# Altium PCB PDB.PcbDoc
Units mm, origin at the board's own origin, x right, y up, seen from the top; angles counter-clockwise.
Board outline 100 x 100 mm, 2 copper layers (Top Layer, Bottom Layer); 15 components, 13 nets, 42 pads, 0 vias.
Unrouted connection lines stored in the file: 27.
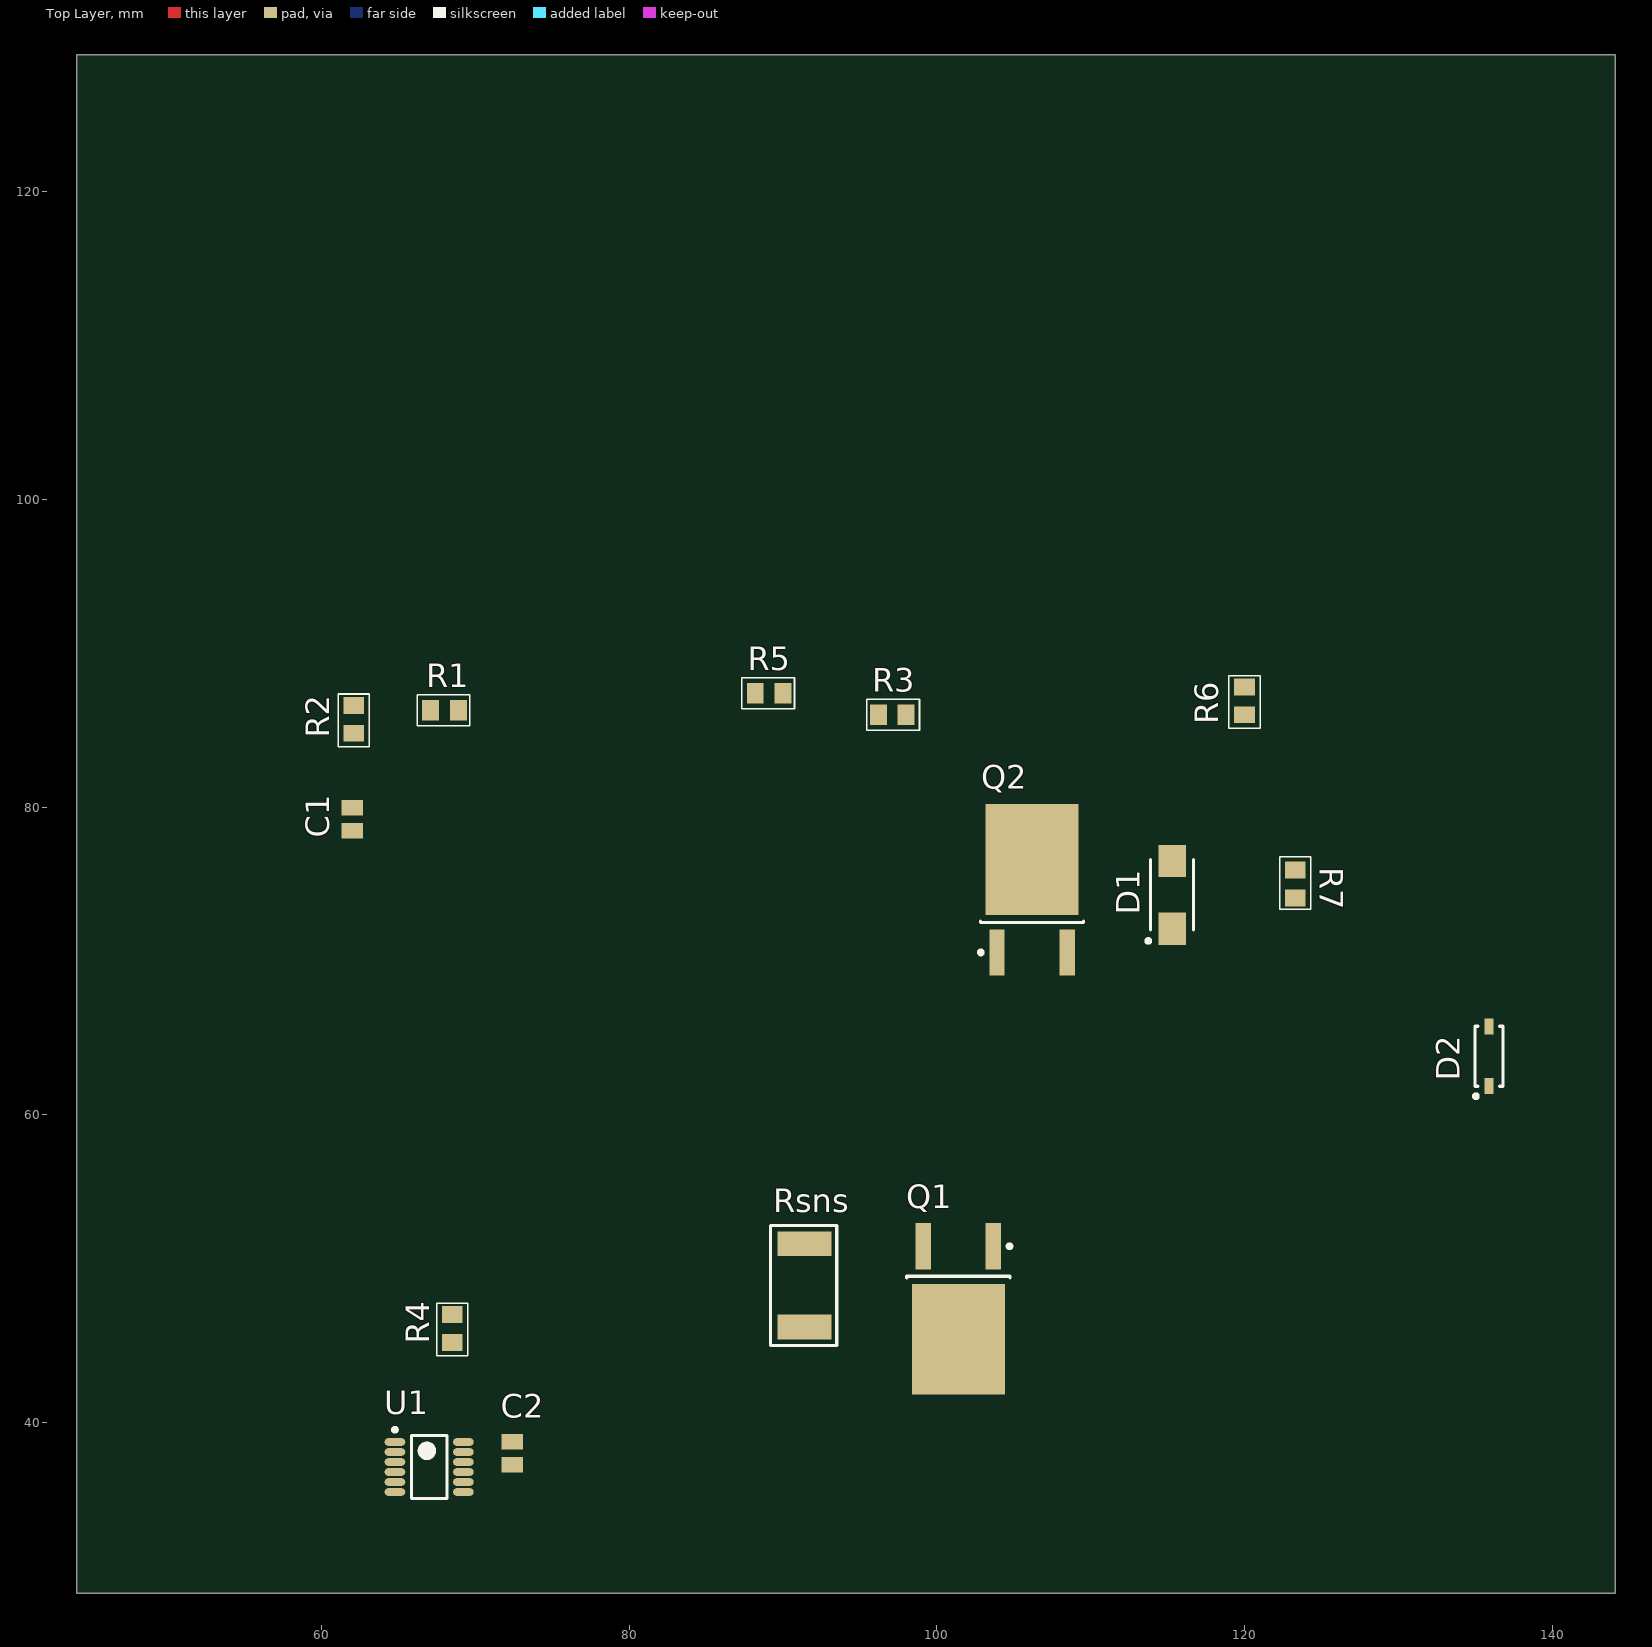
[diagram p0: Top Layer view]
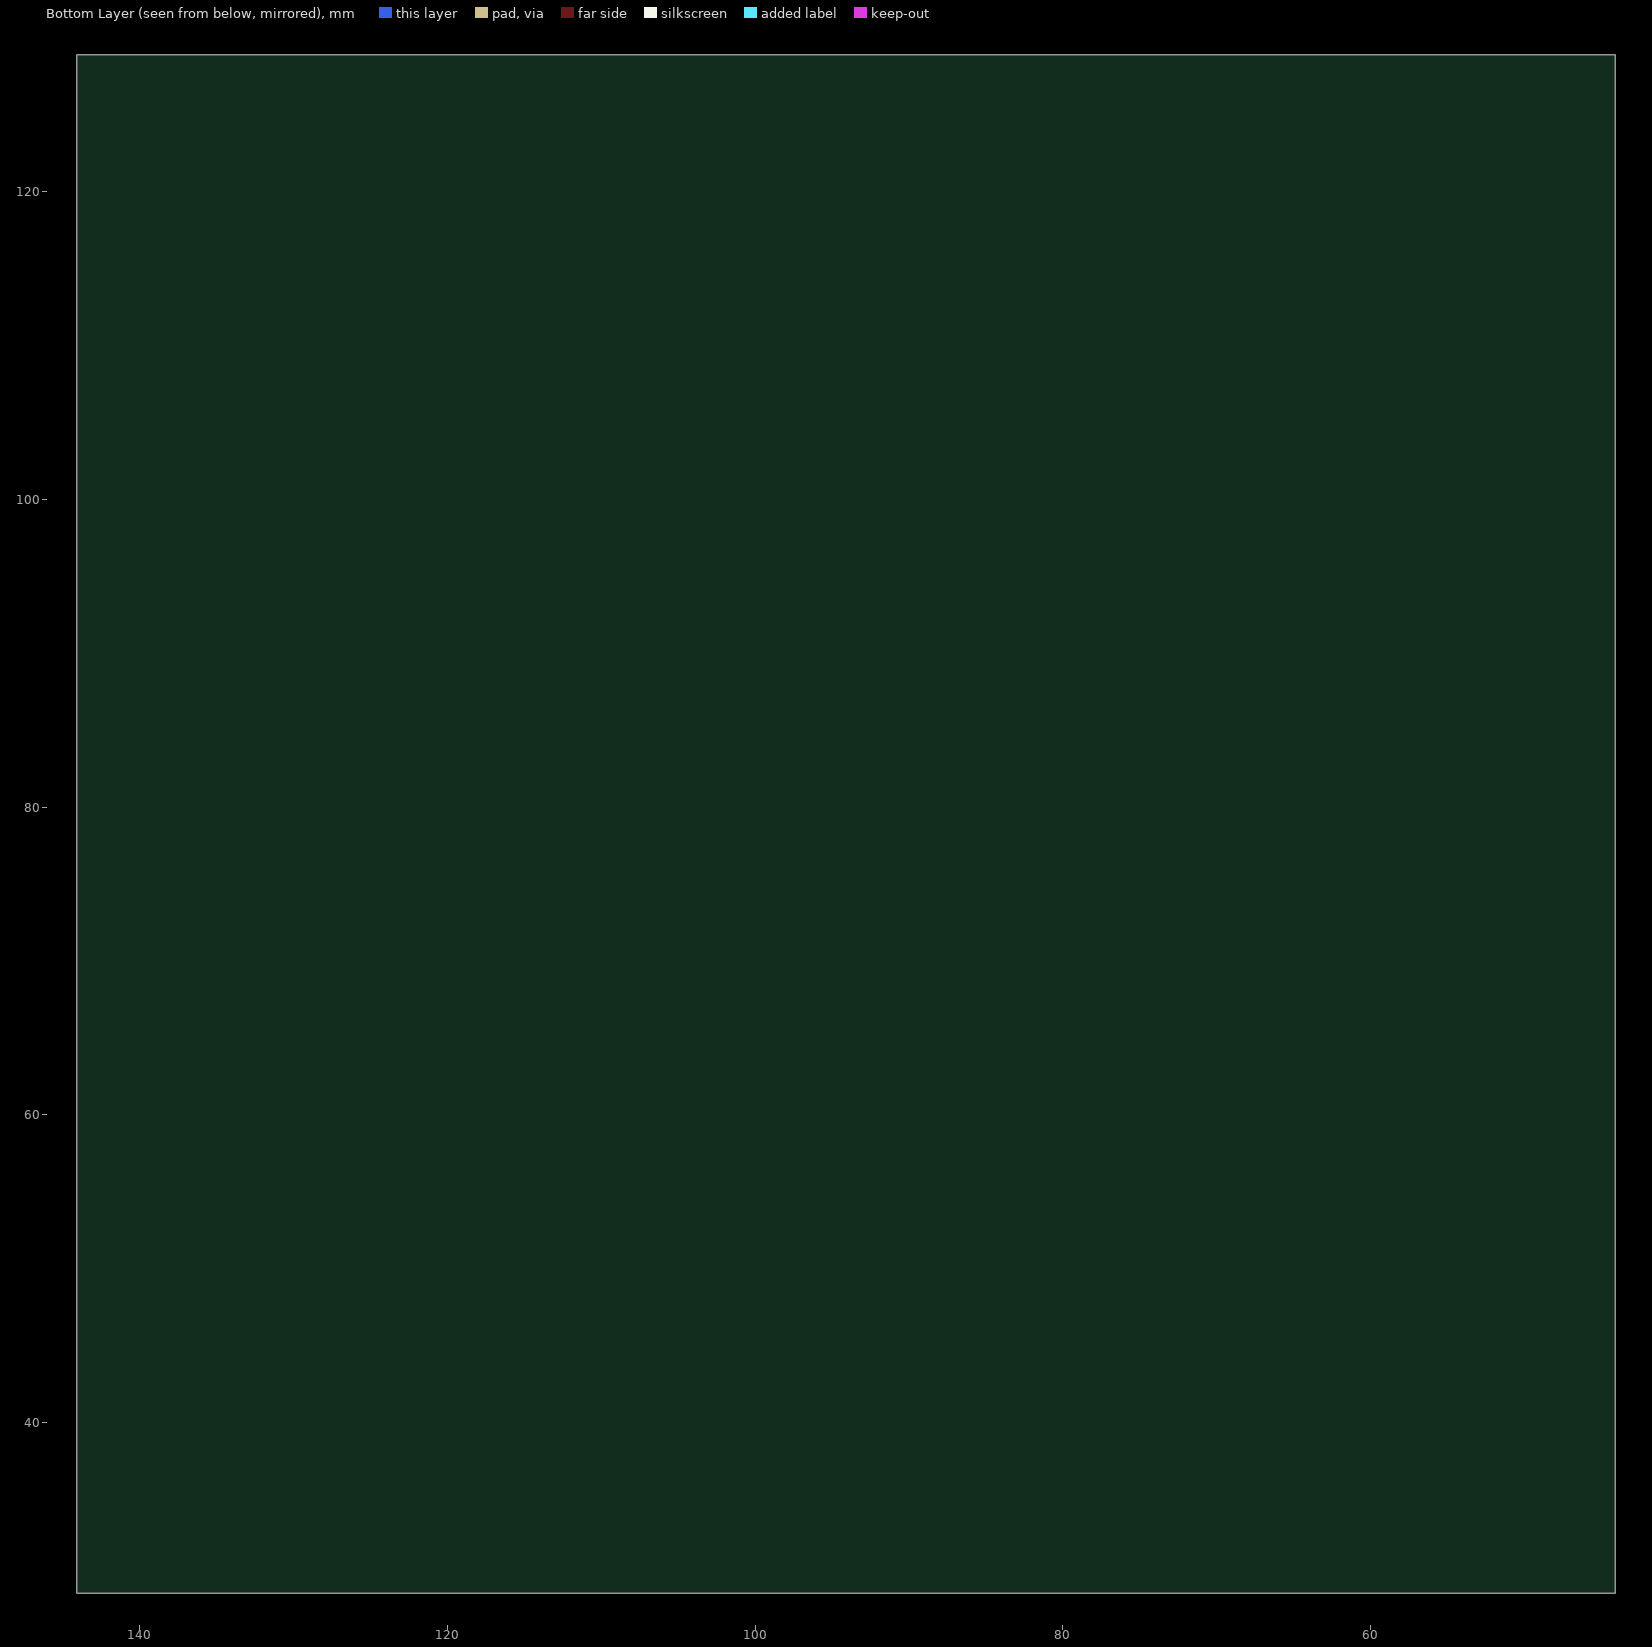
[diagram p1: Bottom Layer view, seen from below]

## Layer stack, top to bottom
Top Solder: solder mask 0.0102, Solder Resist, Dk 3.5
Top Layer: signal copper 0.0356
Dielectric 1: dielectric 0.32, FR-4, Dk 4.8
Bottom Layer: signal copper 0.0356
Bottom Solder: solder mask 0.0102, Solder Resist, Dk 3.5

## Board outline
44.1,28.9 44.1,128.9 144.1,128.9 144.1,28.9

## Design rules (kind name [scope] priority, off if disabled: settings)
Clearance [All] p1: gap=0.254 ignorepadtopadclearanceinfootprint=TRUE except(0: Arc-Hole Track-Hole SMDPad-Hole THPad-Hole Via-Hole Fill-Hole Poly-Hole Region-Hole Text-Hole)
PolygonConnect [All] p1: connectstyle=Relief reliefconductorwidth=0.254 reliefentries=4 polygonreliefangle="90 Angle" airgapwidth=0.254
RoutingVias [All] p1: holewidth=0.711 width=1.27 viastyle="Through Hole" minholewidth=0.711 minwidth=1.27 maxholewidth=0.711 maxwidth=1.27
SolderMaskExpansion [All] p1: expansion=0.102
Width [All] p1: maxlimit=0.254 minlimit=0.254 preferedwidth=0.254
30 further rules are at their usual default settings.

## Components (designator, comment, footprint, x,y, rotation, side; value= is the part's Value field where it differs from the comment)
C1 "47nF" CAPC1613X09N 62,79.2 r90 top
C2 "0.1uF C" CAPC1613X09N 72.4,38 r90 top
D1 "TVS DIODE" DIODE_TVS 115.3,74.3 r90 top
D2 "Zerner Diod" DIOM3716X14N 135.9,63.8 r90 top
Q1 "IRLR2908TRLPBF" DPAK 101.4,47.35 r270 top
Q2 "STD35P6LLF6" DPAK 106.2,74.65 r90 top
R1 "100K Resistor" R0805 68,86.3 r0 top
R2 "5K" R0805 62.1,85.7 r90 top
R3 "10 ohm" R0805 97.1,86 r180 top
R4 "220K R" R0805 68.5,46.1 r90 top
R5 "10K" R0805 89.1,87.4 r0 top
R6 "5K" R0805 120,86.9 r90 top
R7 "10K" R0805 123.3,75 r270 top
Rsns "0.01OHM" R2512 91.4,48.9 r90 top
U1 "LT4363" TSOP65P490X110-12N 67,37.1 r0 top

## Footprints (in the part's own frame and the unit in brackets; to place one, negate y for a bottom-side part, rotate by r counter-clockwise, add the part's x,y. Pads: shape width x height; smd on the part's side, far side on the other; paste and mask are expansions set on the pad)
CAPC1613X09N [mm] "Chip Capacitor, 2-Leads, Body 1.60x1.30mm, IPC Medium Density"
  rect 1x1.4 smd: 1(-0.75,0) 2(0.75,0)
  body extent -0.85,-0.67 0.85,0.67, height 0.9
DIODE_TVS [mm] "Molded Diode, 2-Leads, Body 4.29x2.59mm, IPC Medium Density"
  rect 2.1x1.8 smd: 1(-2.2,0) 2(2.2,0)
  silkscreen extent -3.12,-1.4 2.3,1.67, body extent -2.52,-1.4 2.52,1.4, height 2.29
DIOM3716X14N [mm] "Molded Diode, 2-Leads, Body 3.70x1.60mm, IPC Medium Density"
  rect 1.05x0.6 smd: 1(-1.925,0) 2(1.925,0)
  silkscreen extent -2.72,-0.9 1.95,0.97, body extent -2.14,-0.9 2.14,0.9, height 1.35
DPAK [mm] "D-PAK, 3-Pads, Body 6.21x6.73mm (max), IPC Medium Density"
  rect 3x1 smd: 1(-4.1,2.28) 3(-4.1,-2.28)
  rect 7.2x6.05 smd: 4(1.95,0)
  silkscreen extent -4.22,-3.35 -2.05,3.46, body extent -4.39,-3.37 5.52,3.37, height 2.52
R0805 [mm] "Chip Resistor, 2-Leads, Body 2.09x1.30mm, IPC Medium Density"
  rect 1.1x1.35 smd: 1(-0.9,0) 2(0.9,0)
  silkscreen extent -1.78,-1.02 1.65,1.02, body extent -1.1,-0.67 1.1,0.67, height 0.6
R2512 [mm]
  rect 1.6x3.5 smd: 1(-2.7,0) 2(2.7,0)
  silkscreen extent -3.9,-2.1 3.9,2.2
TSOP65P490X110-12N [mm] "TSOP, 12-Leads, Body 4.04x3.00mm, Pitch 0.65mm, IPC Medium Density"
  oval 1.35x0.5 smd: 1(-2.225,1.625) 2(-2.225,0.975) 3(-2.225,0.325) 4(-2.225,-0.325) 5(-2.225,-0.975) 6(-2.225,-1.625) 7(2.225,-1.625) 8(2.225,-0.975) 9(2.225,-0.325) 10(2.225,0.325) 11(2.225,0.975) 12(2.225,1.625)
  silkscreen extent -2.35,-2.05 1.15,2.55, body extent -2.45,-2.05 2.45,2.05, height 1.1

## Part data
C1: library part GCM188R71H473KA55D, "CAP CER 0.047UF 50V X7R 0603", Case/Package=0603, Case Code (Metric)=1608, Dielectric=X7R, Manufacturer=Murata, Max Operating Temperature=125°C, Min Operating Temperature=-55°C, Package Quantity=1, Ratings=AEC-Q200, Supplier Part Number 1=490-4934-1-ND, Tolerance=10%, Voltage=50V, Capacitance=47nF, Case Code (Imperial)=0603, Depth=0.8mm, Height=0.8mm, Lead Free="Lead Free", Length=1.6mm, Manufacturer Part Number=GCM188R71H473KA55D, Mount="Surface Mount", Packaging="Tape and Reel", Pricing 1="1=0.16, 10=0.115, 100=0.054, 500=0.03788, 1000=0.03136 (USD)", Radiation Hardening=No, REACH SVHC="No SVHC", Stock 1=40000, Supplier 1=Digi-Key, Termination=SMD/SMT, Thickness=0.035inch, Voltage Rating=50V, Voltage Rating (DC)=50V, Width=0.031inch
C2: library part CL05A104KA5NNNC, "Cap Ceramic 0.1uF 25V X5R 10% SMD 0402 85C Paper T/R", Capacitance=100nF, Case/Package=0402, Case Code (Metric)=1005, Dielectric=X5R, Manufacturer=Samsung, Max Operating Temperature=85°C, Min Operating Temperature=-55°C, Package Quantity=1, Supplier Part Number 1=1276-1043-6-ND, Tolerance=10%, Voltage=25V, Case Code (Imperial)=0402, Depth=0.5mm, Height=0.5mm, Lead Free="Lead Free", Length=1mm, Manufacturer Part Number=CL05A104KA5NNNC, Mount="Surface Mount", Packaging="Tape and Reel", Pricing 1="1=0.1, 10=0.032, 100=0.0141, 500=0.01006, 1000=0.00791, 2500=0.00719, 5000=0.00661 (USD)", Radiation Hardening=No, Stock 1=100000, Supplier 1=Digi-Key, Thickness=0.022inch, Voltage Rating=25V, Voltage Rating (DC)=25V, Width=0.02inch
D1: library part SMAJ58A-13-F, "TVS DIODE 58VWM 93.6VC SMA", Breakdown Voltage=64.4V, Capacitance=180pF, Case/Package=SMA, Clamping Voltage=93.6V, Current=43A, Forward Voltage=3.5V, Leakage Current=5uA, Manufacturer=Diodes, Max Breakdown Voltage=71.2V, Max Operating Temperature=150°C, Max Output Current=4.3A, Max Power Dissipation=400W, Max Surge Current=40A, Min Operating Temperature=-55°C, Package Quantity=5000, Power Line Protection=No, Reverse Standoff Voltage=58V, Supplier Part Number 1=SMAJ58A-13-FDIDKR-ND, Test Current=1mA, Composition=Zener, Contact Plating=Matte,Tin, Direction=Unidirectional, Element Configuration=Single, ESD Protection=No, Height=2.3mm, Lead Free="Lead Free", Length=2.92mm, Manufacturer Part Number=SMAJ58A-13-F, Max Reverse Leakage Current=5uA, Min Breakdown Voltage=64.4V, Mount="Surface Mount", Number of Elements=1, Number of Pins=2, Number of Unidirectional Channels=1, Packaging="Tape and Reel", Peak Pulse Current=4.3A, Peak Pulse Power=400W, Polarity=Unidirectional, Power Dissipation=400W, Pricing 1="1=0.41, 10=0.311, 100=0.1937, 500=0.13256, 1000=0.10197 (USD)", Radiation Hardening=No, Reverse Breakdown Voltage=64.4V, Stock 1=387453, Supplier 1=Digi-Key, Termination=SMD/SMT, Voltage=58V, Width=4.6mm, Working Voltage=58V
D2: library part 1N4148W-TP, "DIODE GEN PURP 100V 150MA SOD123", Average Rectified Current=150mA, Capacitance=4pF, Forward Voltage=1V, Manufacturer=MCC, Max Forward Surge Current (Ifsm)=1A, Max Operating Temperature=150°C, Max Repetitive Reverse Voltage (Vrrm)=100V, Max Reverse Leakage Current=5uA, Max Surge Current=2A, Min Operating Temperature=-65°C, Package Quantity=3000, Power Dissipation=400mW, Supplier Part Number 1=1N4148WTPMSDKR-ND, Current Rating=150mA, Element Configuration=Single, Forward Current=150mA, Height=1.2mm, Lead Free="Lead Free", Length=2.85mm, Manufacturer Part Number=1N4148W-TP, Max Reverse Voltage (DC)=100V, Mount="Surface Mount", Number of Pins=2, Output Current=150mA, Packaging="Tape and Reel", Peak Non-Repetitive Surge Current=2A, Polarity=Standard, Pricing 1="1=0.14, 10=0.131, 100=0.0856, 500=0.04186, 1000=0.02854 (USD)", Radiation Hardening=No, REACH SVHC=Unknown, Recovery Time=4ns, Reverse Recovery Time=4ns, Stock 1=546277, Supplier 1=Digi-Key, Voltage Rating (DC)=100V, Width=1.8mm
Q1: "MOSFET N-CH 80V 30A DPAK", Case/Package=DPAK, Continuous Drain Current (ID)=39A, Drain to Source Breakdown Voltage=80V, Drain to Source Resistance=28mR, Gate to Source Voltage (Vgs)=16V, Input Capacitance=1.89nF, Manufacturer="International Rectifier", Max Operating Temperature=175°C, Max Power Dissipation=120W, Min Operating Temperature=-55°C, On-State Resistance=28MR, Package Quantity=1, Supplier Part Number 1=IRLR2908TRLPBFDKR-ND, Threshold Voltage=1V, Drain to Source Voltage (Vdss)=80V, Element Configuration=Single, Fall Time=55ns, Height=2.26mm, Length=6.73mm, Manufacturer Part Number=IRLR2908TRLPBF, Mount="Surface Mount", Nominal Vgs=1V, Number of Elements=1, Number of Pins=3, Packaging="Tape and Reel", Power Dissipation=120W, Pricing 1="1=1.4, 10=1.239, 100=0.9794, 500=0.75958, 1000=0.59966 (USD)", Radiation Hardening=No, Rds On Max=28mR, REACH SVHC="No SVHC", Rise Time=95ns, Stock 1=4490, Supplier 1=Digi-Key, Turn-Off Delay Time=36ns, Turn-On Delay Time=12ns, Width=6.22mm
Q2: "POWER MOSFET", Case/Package=TO-252-3, Continuous Drain Current (ID)=35A, Drain to Source Voltage (Vdss)=60V, Input Capacitance=3.78nF, Manufacturer=STMicroelectronics, Max Power Dissipation=70W, Supplier Part Number 1=497-15462-6-ND, Manufacturer Part Number=STD35P6LLF6, Mount="Surface Mount", Packaging="Tape and Reel", Pricing 1="1=1.41, 10=1.248, 100=0.9867, 500=0.76518, 1000=0.6041 (USD)", Rds On Max=28mR, Stock 1=7152, Supplier 1=Digi-Key
R1: library part ERA-6AEB104V, "Res Thin Film 0805 100K Ohm 0.1% 0.125W(1/8W) ±25ppm/C Molded SMD Automotive Punched T/R", Case/Package=0805, Case Code (Metric)=2012, Manufacturer=Panasonic, Max Operating Temperature=155°C, Max Power Dissipation=125mW, Min Operating Temperature=-55°C, Package Quantity=1, Resistance=100kR, Temperature Coefficient=25ppm/°C, Tolerance=0.1%, Voltage Rating=100V, Case Code (Imperial)=0805, Composition="Thin Film", Contact Plating=Tin, Depth=1.25mm, Features="Automotive AEC-Q200", Height=0.5mm, Lead Free="Lead Free", Length=2mm, Manufacturer Part Number=ERA-6AEB104V, Military Standard=Not, Mount="Surface Mount", Number of Pins=2, Number of Terminations=2, Packaging="Tape and Reel", Power Rating=125mW, Pricing 1="1=0.324, 10=0.2241, 25=0.2017, 100=0.1064, 250=0.0956, 500=0.0945, 1000=0.0477, 3000=0.0408 (USD)", Radiation Hardening=No, REACH SVHC="No SVHC", Stock 1=2428, Supplier 1=Arrow, Supplier Part Number 1=ERA-6AEB104V, Termination=Solder, Voltage Rating (DC)=100V, Width=1.25mm
R2 R6: library part PNM0805E5001BST5, "Thin Film Resistors - SMD 200mW 5Kohm 0.1% 25ppm", Case/Package=0805, Case Code (Metric)=2012, Manufacturer="Vishay Dale Thin Film", Max Operating Temperature=125°C, Min Operating Temperature=-55°C, Power Rating=200mW, Resistance=5kR, Supplier Part Number 1=1857222, Temperature Coefficient=25ppm/°C, Tolerance=0.1%, Voltage Rating=100V, Case Code (Imperial)=0805, Composition="Thin Film", Height=0.015inch, Length=0.08inch, Manufacturer Part Number=PNM0805E5001BST5, Packaging="Tape and Reel", Pricing 1="1=2.59, 10=1.9, 50=1.53, 100=1.36 (GBP)", Radiation Hardening=No, REACH SVHC=Unknown, Stock 1=1231, Supplier 1=Farnell, Voltage Rating (DC)=100V, Width=0.05inch
R3: library part RL1220S-100-F, "RES SMD 10 OHM 1% 1/3W 0805", Case/Package=0805, Case Code (Metric)=2012, Manufacturer=Susumu, Max Operating Temperature=125°C, Max Power Dissipation=333mW, Min Operating Temperature=-55°C, Package Quantity=1, Power Rating=250mW, Resistance=10R, Supplier Part Number 1=754-RL1220S-100-F, Temperature Coefficient=200ppm/°C, Tolerance=1%, Voltage Rating (DC)=100V, Case Code (Imperial)=0805, Composition="Thin Film", Height=0.02inch, Lead Free="Lead Free", Length=0.079inch, Manufacturer Part Number=RL1220S-100-F, Number of Pins=2, Number of Terminations=2, Packaging="Tape and Reel", Pricing 1="1=0.34, 10=0.156, 50=0.156, 100=0.07, 1000=0.048, 10000=0.034 (USD)", REACH SVHC=Unknown, Stock 1=32764, Supplier 1=Mouser, Termination=SMD/SMT, Weight=0.000194oz, Width=0.049inch
R4: library part KTR10EZPF2203, "RES 220K OHM 1/8W 1% 0805 SMD", Case/Package=0805, Manufacturer=Rohm, Resistance=220000R, Supplier Part Number 1=RHM220KAHDKR-ND, Manufacturer Part Number=KTR10EZPF2203, Pricing 1="1=0.19, 10=0.16, 100=0.0624, 1000=0.02614, 2500=0.02396 (USD)", Stock 1=23335, Supplier 1=Digi-Key
R5 R7: library part RNCF0805DTE10K0, "Res Thin Film 0805 10K Ohm 0.5% 0.1W(1/10W) ±25ppm/C Molded SMD Paper T/R", Case/Package=0805, Case Code (Metric)=2012, Manufacturer="Stackpole Electronics", Max Operating Temperature=155°C, Max Power Dissipation=125mW, Min Operating Temperature=-55°C, Resistance=10kR, Supplier Part Number 1=RNCF0805DTE10K0DKR-ND, Temperature Coefficient=25ppm/°C, Tolerance=0.5%, Case Code (Imperial)=0805, Composition="Thin Film", Contact Plating=Matte,Tin, Depth=1.25mm, Features="Moisture Resistant", Height=0.026inch, Length=2mm, Manufacturer Part Number=RNCF0805DTE10K0, Military Standard=Not, Mount="Surface Mount", Number of Terminations=2, Packaging="Tape and Reel", Pricing 1="1=0.17, 10=0.14, 100=0.0546, 1000=0.02287, 2500=0.02096 (USD)", Radiation Hardening=No, Stock 1=377154, Supplier 1=Digi-Key, Width=0.049inch
Rsns: library part PE2512FKE7W0R01L, "RES SMD 0.01 OHM 1% 2W 2512", Case/Package=2512, Case Code (Metric)=6432, Manufacturer=Yageo, Max Operating Temperature=170°C, Max Power Dissipation=2W, Min Operating Temperature=-55°C, Resistance=10mR, Temperature Coefficient=50ppm/°C, Tolerance=1%, Case Code (Imperial)=2512, Composition="Metal Film", Features="Automotive AEC-Q200,Moisture Resistant", Height=0.03inch, Lead Free="Lead Free", Length=0.248inch, Manufacturer Part Number=PE2512FKE7W0R01L, Number of Terminations=2, Packaging="Tape and Reel", Pricing 1="1=0.57, 10=0.479, 25=0.4104, 50=0.3694, 100=0.3215, 250=0.28732, 500=0.23258, 1000=0.18812 (USD)", Stock 1=15960, Supplier 1=Digi-Key, Width=0.122inch
U1: library part LT4363CMS-2#PBF, "IC SURGE STOPPER HV 12-MSOP", Case/Package=MSOP, Clamping Voltage=27V, Manufacturer="Analog Devices / Linear Technology", Max Operating Temperature=70°C, Max Supply Voltage=80V, Min Operating Temperature=0°C, Min Supply Voltage=4V, Package Quantity=37, Supplier Part Number 1=LT4363CMS-2#PBF-ND, Lead Free="Lead Free", Manufacturer Part Number=LT4363CMS-2#PBF, Number of Circuits=1, Number of Pins=12, Packaging=Rail/Tube, Pricing 1="1=5.41, 25=3.6108, 100=3.0702 (USD)", REACH SVHC="No SVHC", Stock 1=1640, Supplier 1=Digi-Key, Working Voltage=80V

## Nets (pads, with @x,y where several pads share a name; then routed paths per layer and width w, separated by ;. In a path a pad name is that pad's centre, name@x,y a point inside that pad or via, vN(x,y) a via of type N, cw(c..) or ccw(c..) an arc to the next point about the centre after c; other vN are vias at no path point)
+24V: D1.2 Q2.4 R6.2 U1.5
FET_GATE: Q1.1 R3.1
GND: C1.1 C2.1 D1.1 R2.1 R7.2 U1.9
IC_GATE: C1.2 R3.2 U1.4
NetC2_2: C2.2 U1.12
NetD2_1: D2.1 Q1.4 Q2.3
NetD2_2: D2.2 Q2.1 R7.1
NetR1_1: R1.1 R2.2 U1.1
NetR1_2: R1.2 Rsns.1 U1.2
NetR4_1: R4.1 R5.1 U1.8
NetR5_2: R5.2 R6.1 U1.7
SHDN: R4.2 U1.6
SNS: Q1.3 Rsns.2 U1.3
pads on no net: U1.10 U1.11